# Altium PCB CFD_2Channel.PcbDoc (part 2 of 3)
Units mil, origin at the board's own origin, x right, y up, seen from the top; angles counter-clockwise.
Board outline 5560 x 8750 mil, 4 copper layers (Top Layer, Top Plane, Bottom Plane, Bottom Layer), stack 61.356 mil thick; 216 components, 185 nets, 910 pads, 397 vias.
Unrouted connection lines stored in the file: 1.
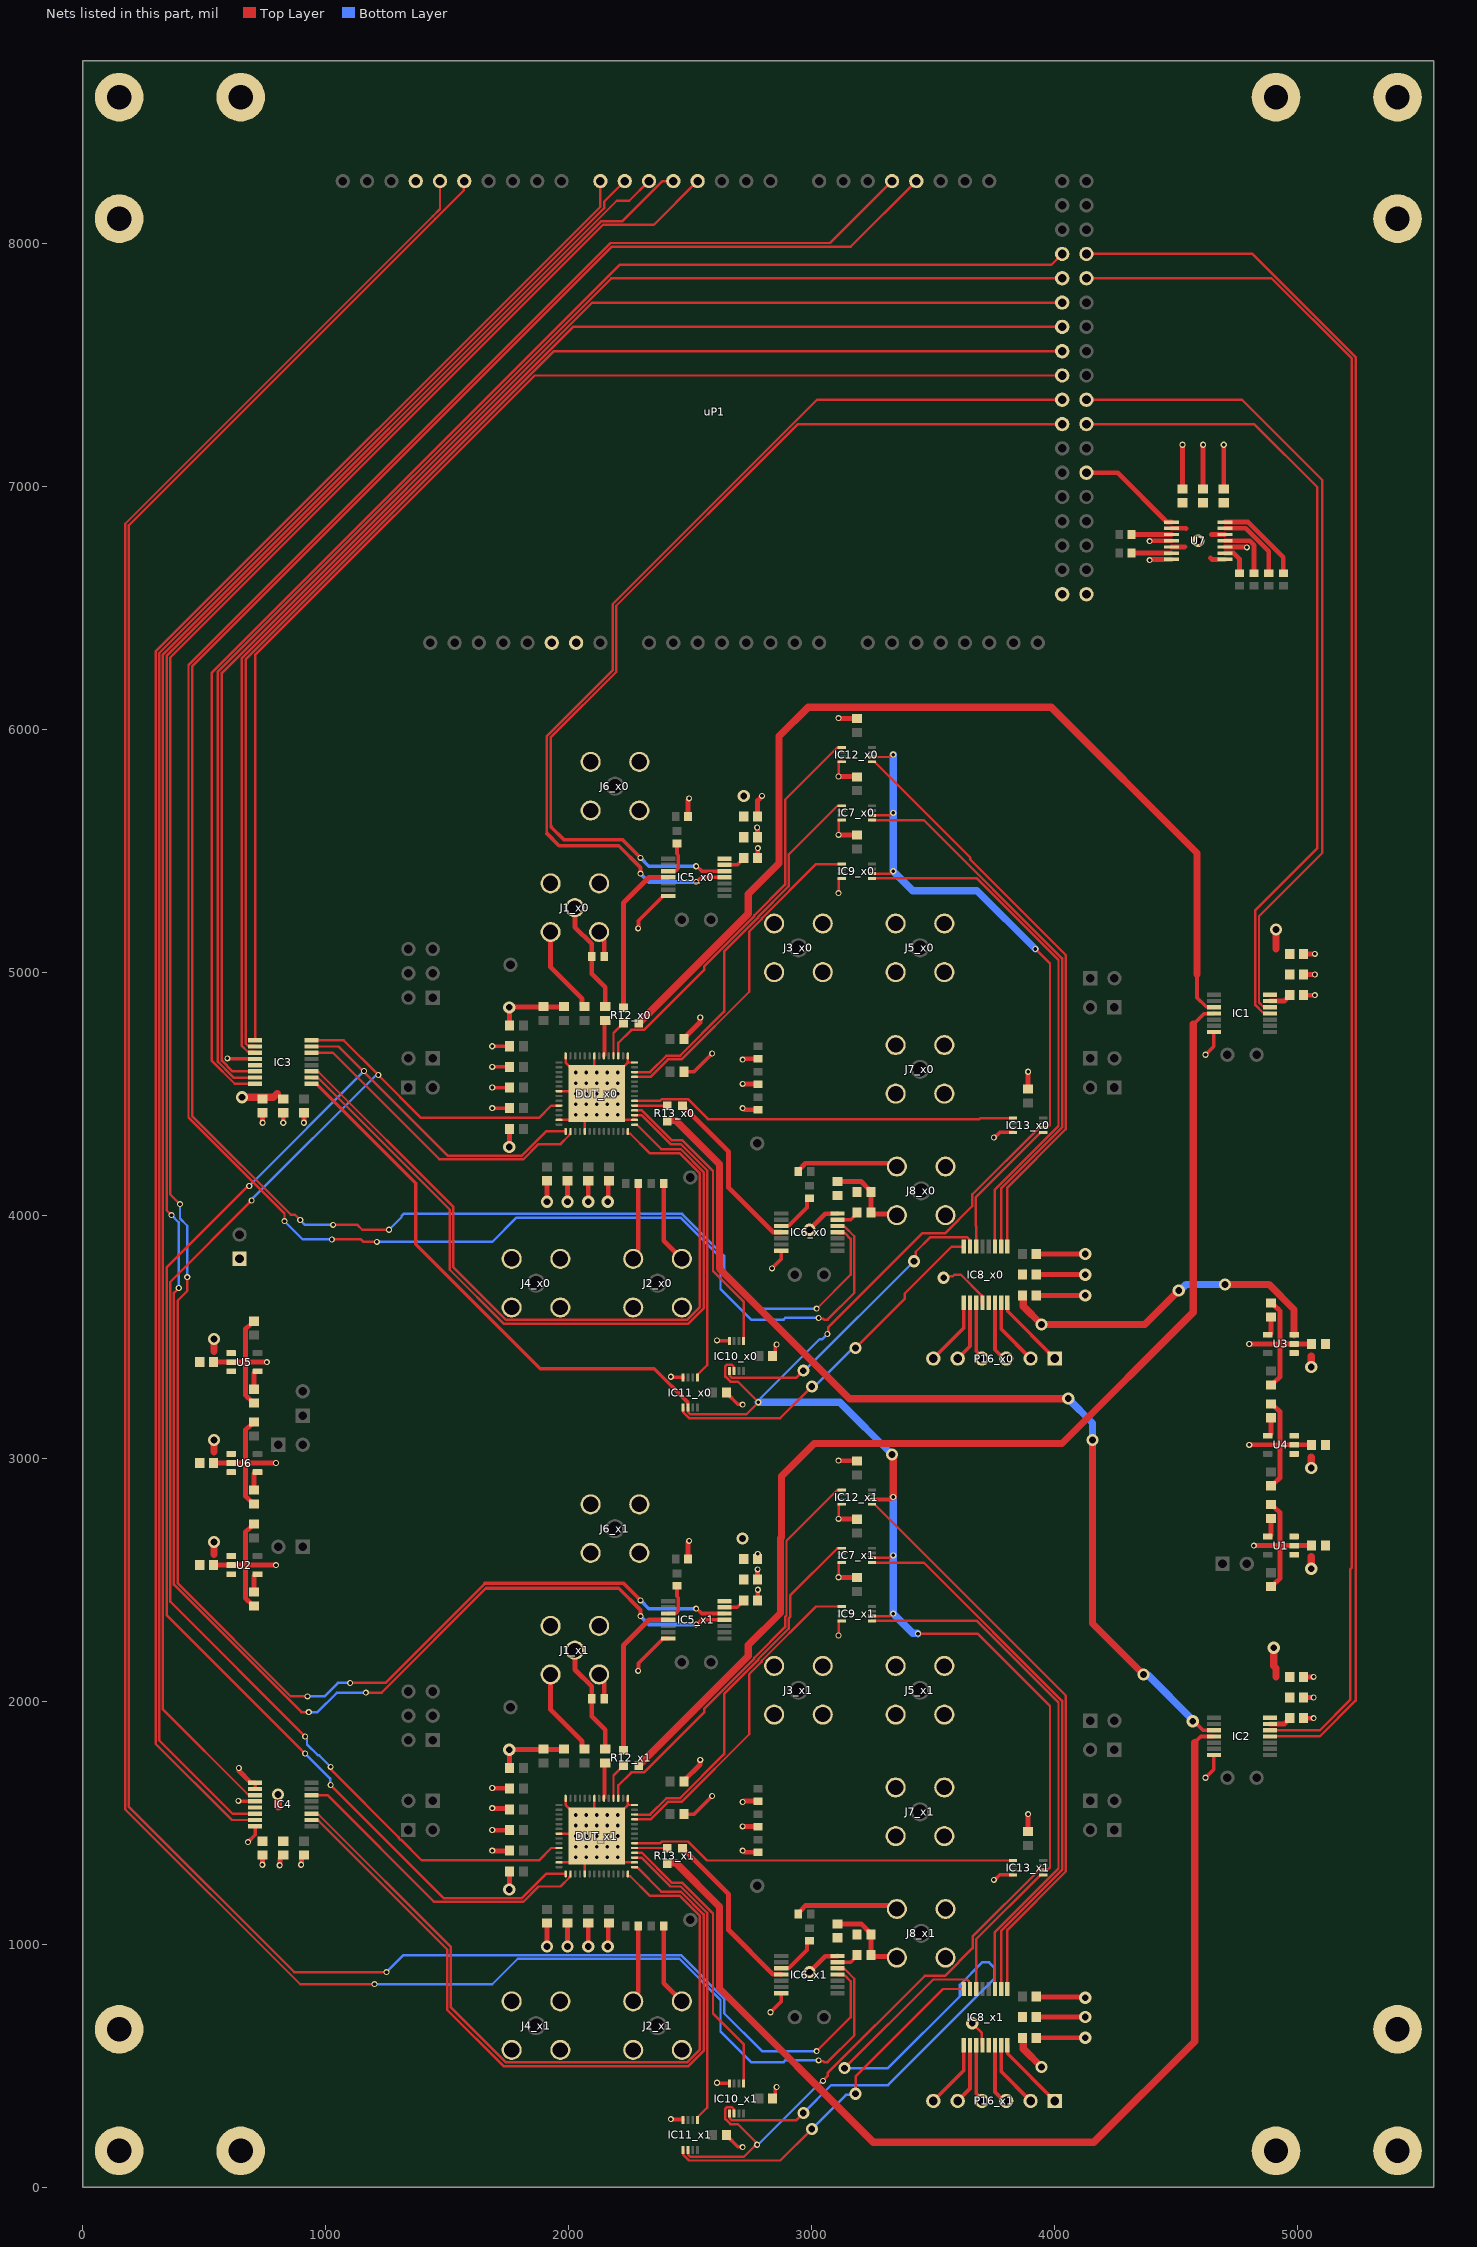
[diagram p4: the nets of this part, all layers, seen from the top]

## Via types
v1: diameter 25, hole 15, Top Layer to Bottom Layer, 290 vias
v2: diameter 50, hole 28, Top Layer to Bottom Layer, 105 vias
v3: diameter 59.06, hole 35.43, Top Layer to Bottom Layer, 2 vias

## Nets (pads, with @x,y where several pads share a name; then routed paths per layer and width w, separated by ;. In a path a pad name is that pad's centre, name@x,y a point inside that pad or via, vN(x,y) a via of type N, cw(c..) or ccw(c..) an arc to the next point about the centre after c; other vN are vias at no path point) (continued)
+3.3VPSU: C1.1 C3.1 C7.1 C9.1 C13.1 C15.1 C20.1 C21.1 C23.1 C24.1 C25.2 C26.2 C28.2 C29.2 C32_x0.1 C32_x1.1 C33_x0.1 C33_x1.1 C35_x0.1 C35_x1.1 C36_x0.1 C36_x1.1 C41_x0.2 C41_x1.2 C42_x0.2 C42_x1.2 C62.1 C63.1 C64.1 IC1.14 IC2.14 IC3.13 IC4.13 IC5_x0.14 IC5_x1.14 IC6_x0.14 IC6_x1.14 IC8_x0.13 IC8_x1.13 P3.1 pad.2 U1.1 U1.3 U2.1 U2.3 U3.1 U3.3 U4.1 U4.3 U5.1 U5.3 U6.1 U6.3 U7.2 U7.5 U7.8 U7.12 | length 2778.3
  Top Layer w20: v2(2990,885) 3055.63,950.63 3104.53,950.63 IC6_x1.14@3105.67,951.77 ; v2(2990,3940) 3055.63,4005.63 3104.53,4005.63 IC6_x0.14@3105.67,4006.77 ; U7.5@4479.76,6749.41 4534.41,6749.41 4535,6750 ; U7.2@4479.76,6826.18 4538.82,6826.18 4540,6825 ; 4640,6705 4646.77,6698.23 U7.8@4700.24,6698.23 ; 4645,6800 4645.59,6800.59 U7.12@4700.24,6800.59
  Top Layer w30: 540,2605 v2(540,2655) ; 540,3025 v2(540,3075) ; 540,3440 v2(540,3490) ; v2(655,4485) 785,4485 800,4500 ; v2(803.29,1616.2) 805,1614.49 805,1565 ; C42_x1.2@3866.46,615 3870.16,611.3 3870.16,569.84 v2(3945,495) ; C42_x0.2@3866.46,3670 3870.16,3666.3 3870.16,3624.84 v2(3945,3550) 4370,3550 v2(4510,3690) ; v2(4700,3715) 4881.2,3715 4984.13,3612.06 U3.3@4984.13,3507.4 ; v2(4900.5,2220) 4900.5,2144.5 4910,2135 4910,2100 ; 4910,5095 v2(4910,5175) ; v2(5055,2545) 5055,2595 ; v2(5055,2960) 5055,3005 ; v2(5055,3375) 5055,3420
  Bottom Layer w30: v2(4510,3690) 4515.41,3690 4540.41,3715 v2(4700,3715)
  other v2: 2715,2670 2720,5725 4590,6775
CLK_16MHz: U7.1 uP1.45 | length 433.9
  Top Layer w20: uP1.45@4130,7055 4258.15,7055 4461.38,6851.77 U7.1@4479.76,6851.77
GND: C1.2 C2.2 C3.2 C4.2 C5.2 C6.2 C7.2 C8.2 C9.2 C10.2 C11.2 C12.2 C13.2 C14.2 C15.2 C16.2 C17.2 C18.2 C19.2 C20.2 C21.2 C22.2 C23.2 C24.2 C25.1 C26.1 C27.2 C28.1 C29.1 C30.2 C32_x0.2 C32_x1.2 C33_x0.2 C33_x1.2 C34_x0.2 C34_x1.2 C35_x0.2 C35_x1.2 C36_x0.2 C36_x1.2 C37_x0.2 C37_x1.2 C38_x0.1 C38_x1.1 C39_x0.1 C39_x1.1 C40_x0.1 C40_x1.1 C41_x0.1 C41_x1.1 C42_x0.1 C42_x1.1 C43_x0.1 C43_x1.1 C44_x0.1 C44_x1.1 C45_x0.1 C45_x1.1 C46_x0.1 C46_x1.1 C47_x0.1 C47_x1.1 C48_x0.1 C48_x1.1 C49_x0.1 C49_x1.1 C50_x0.1 C50_x1.1 C51_x0.1 C51_x1.1 C52_x0.1 C52_x1.1 C53_x0.1 C53_x1.1 C54_x0.1 C54_x1.1 C55_x0.1 C55_x1.1 C56_x0.1 C56_x1.1 C57_x0.1 C57_x1.1 C58_x0.1 C58_x1.1 C59_x0.1 C59_x1.1 C60_x0.1 C60_x1.1 C61_x0.1 C61_x1.1 C62.2 C63.2 C64.2 CORNER1.1 CORNER2.1 CORNER3.1 CORNER4.1 DUT_x0.7 DUT_x0.13 DUT_x0.19 DUT_x0.30 DUT_x0.42 DUT_x0.43 DUT_x0.50 DUT_x0.56 DUT_x1.7 DUT_x1.13 DUT_x1.19 DUT_x1.30 DUT_x1.42 DUT_x1.43 DUT_x1.50 DUT_x1.56 IC1.7 IC2.7 IC3.12 IC4.9 IC4.10 IC4.12 IC4.16 IC5_x0.7 IC5_x1.7 IC6_x0.7 IC6_x1.7 IC7_x0.4 IC7_x1.4 IC8_x0.12 IC8_x1.12 IC9_x0.4 IC9_x1.4 IC10_x0.4 IC10_x1.4 IC11_x0.4 IC11_x1.4 IC12_x0.4 IC12_x1.4 IC13_x0.4 IC13_x1.4 J1_x0.2 J1_x0.3 J1_x0.4 J1_x0.5 J1_x1.2 J1_x1.3 J1_x1.4 J1_x1.5 J2_x0.2 J2_x0.3 J2_x0.4 J2_x0.5 J2_x1.2 J2_x1.3 J2_x1.4 J2_x1.5 J3_x0.2 J3_x0.3 J3_x0.4 J3_x0.5 J3_x1.2 J3_x1.3 J3_x1.4 J3_x1.5 J4_x0.2 J4_x0.3 J4_x0.4 J4_x0.5 J4_x1.2 J4_x1.3 J4_x1.4 J4_x1.5 J5_x0.2 J5_x0.3 J5_x0.4 J5_x0.5 J5_x1.2 J5_x1.3 J5_x1.4 J5_x1.5 J6_x0.2 J6_x0.3 J6_x0.4 J6_x0.5 J6_x1.2 J6_x1.3 J6_x1.4 J6_x1.5 J7_x0.2 J7_x0.3 J7_x0.4 J7_x0.5 J7_x1.2 J7_x1.3 J7_x1.4 J7_x1.5 J8_x0.2 J8_x0.3 J8_x0.4 J8_x0.5 J8_x1.2 J8_x1.3 J8_x1.4 J8_x1.5 R2_x0.1 R2_x1.1 R3_x0.1 R3_x1.1 R4_x0.1 R4_x1.1 R5_x0.1 R5_x1.1 R7_x0.1 R7_x1.1 R8_x0.1 R8_x1.1 R10_x0.1 R10_x1.1 R11_x0.1 R11_x1.1 U1.2 U2.2 U3.2 U4.2 U5.2 U6.2 U7.4 U7.7 U7.10 uP1.GND | length 19215.9
  Top Layer w10: DUT_x1.13@1959.49,1336.73 2006.73,1336.73 v1(2028.39,1358.39) DUT_x1.30@2065.79,1395.79 ; DUT_x1.7@1959.49,1454.84 DUT_x1.30@2105.16,1454.84 ; DUT_x0.13@1959.49,4391.73 2006.73,4391.73 v1(2028.39,4413.39) DUT_x0.30@2065.79,4450.79 ; DUT_x0.7@1959.49,4509.84 DUT_x0.30@2105.16,4509.84 ; DUT_x1.56@1987.05,1600.51 1987.05,1572.95 v1(2028.39,1531.61) v1(2071.69,1488.31) DUT_x1.30@2105.16,1454.84 ; DUT_x0.56@1987.05,4655.51 1987.05,4627.95 v1(2028.39,4586.61) v1(2071.69,4543.31) DUT_x0.30@2105.16,4509.84 ; DUT_x1.19@2065.79,1289.49 DUT_x1.30@2065.79,1395.79 ; DUT_x0.19@2065.79,4344.49 DUT_x0.30@2065.79,4450.79 ; DUT_x1.50@2105.16,1600.51 DUT_x1.30@2105.16,1454.84 ; DUT_x0.50@2105.16,4655.51 DUT_x0.30@2105.16,4509.84 ; DUT_x1.43@2242.95,1600.51 2242.95,1572.95 ; DUT_x0.43@2242.95,4655.51 2242.95,4627.95 ; DUT_x1.30@2270.51,1336.73 2223.27,1336.73 v1(2201.61,1358.39) v1(2158.31,1401.69) v1(2115,1445) ; DUT_x1.42@2270.51,1572.95 2242.95,1572.95 ; DUT_x0.30@2270.51,4391.73 2223.27,4391.73 v1(2201.61,4413.39) v1(2158.31,4456.69) v1(2115,4500) ; DUT_x0.42@2270.51,4627.95 2242.95,4627.95 ; v1(3110,2270) 3111.26,2271.26 3111.26,2329.57 3112.17,2330.47 IC9_x1.4@3122.99,2330.47 ; v1(3110,2510) 3111.26,2511.26 3111.26,2569.57 3112.17,2570.47 IC7_x1.4@3122.99,2570.47 ; v1(3110,2750) 3111.26,2751.26 3111.26,2809.57 3112.17,2810.47 IC12_x1.4@3122.99,2810.47 ; v1(3110,5325) 3111.26,5326.26 3111.26,5384.57 3112.17,5385.47 IC9_x0.4@3122.99,5385.47 ; v1(3110,5565) 3111.26,5566.26 3111.26,5624.57 3112.17,5625.47 IC7_x0.4@3122.99,5625.47 ; v1(3110,5805) 3111.26,5806.26 3111.26,5864.57 3112.17,5865.47 IC12_x0.4@3122.99,5865.47 ; v2(3542.43,3742.57) 3547.95,3748.1 3579.93,3748.1 3586.83,3755 3612.98,3755 3698.35,3669.63 3698.35,3643.19 IC8_x0.12@3702.2,3639.33 ; v2(3660,675) 3698.35,636.65 3698.35,588.19 IC8_x1.12@3702.2,584.33 ; DUT_x1.30@2065.79,1395.79 v1(2071.69,1401.69) v1(2115,1445) ; DUT_x0.30@2065.79,4450.79 v1(2071.69,4456.69) v1(2115,4500) ; DUT_x1.30@2105.16,1454.84 v1(2115,1445) ; DUT_x0.30@2105.16,4509.84 v1(2115,4500) ; v1(2115,1445) v1(2158.31,1488.31) v1(2201.61,1531.61) 2242.95,1572.95 ; v1(2115,4500) v1(2158.31,4543.31) v1(2201.61,4586.61) 2242.95,4627.95
  Top Layer w15: v1(595,4645) 596.1,4643.9 708.23,4643.9 IC3.12@709.33,4642.8 ; v1(640,1590) 641.1,1588.9 708.23,1588.9 IC4.12@709.33,1587.8 IC4.12@710.69,1589.15 ; v1(680,1420) 680,1420.59 709.33,1449.92 IC4.16@709.33,1485.43 ; IC4.9@709.33,1664.57 IC4.10@709.33,1638.98 IC4.10@710.69,1637.62 ; v1@1682.32,4439.35 C52_x0.1@1753.05,4439.35 ; v1@1682.32,4524.35 C46_x0.1@1753.05,4524.35 ; v1@1683.29,4610 C56_x0.1@1755.73,4610 ; v1(1685,4695) C57_x0.1@1756.46,4695 ; v1(2285,2125) 2286.91,2126.91 2286.91,2155.99 2389.15,2258.23 IC5_x1.7@2409.33,2258.23 ; v1(2285,5180) 2286.91,5181.91 2286.91,5210.99 2389.15,5313.23 IC5_x0.7@2409.33,5313.23 ; v1(2420,280) 2421.5,278.5 2468.98,278.5 IC11_x1.4@2470.47,277.01 ; v1(2420,3335) 2421.5,3333.5 2468.98,3333.5 IC11_x0.4@2470.47,3332.01 ; C60_x1.1@2473.54,1535 2515,1535 v1(2590,1610) ; C60_x0.1@2473.54,4590 2515,4590 v1(2590,4665) ; v1(2610,430) 2611.5,428.5 2658.98,428.5 IC10_x1.4@2660.47,427.01 ; v1(2610,3485) 2611.5,3483.5 2658.98,3483.5 IC10_x0.4@2660.47,3482.01 ; C44_x1.1@2648.54,215 2648.54,213.03 2694.66,166.91 2713.09,166.91 v1(2715,165) ; C44_x0.1@2648.54,3270 2648.54,3268.03 2694.66,3221.91 2713.09,3221.91 v1(2715,3220) ; v1(2830,720) 2874.33,764.33 IC6_x1.7@2874.33,798.23 ; v1(2835.91,3780.91) 2874.33,3819.33 IC6_x0.7@2874.33,3853.23 ; C43_x1.1@2838.54,365 2849.74,376.2 2849.74,404.54 2855,409.79 v1(2855,412.5) ; C43_x0.1@2838.54,3420 2849.74,3431.2 2849.74,3459.54 2855,3464.79 v1(2855,3467.5) ; v1(3749.13,1264.6) 3751.84,1264.6 3772.71,1285.47 IC13_x1.4@3827.99,1285.47 ; v1(3749.13,4319.6) 3751.84,4319.6 3772.71,4340.47 IC13_x0.4@3827.99,4340.47 ; v1(4620,1685) 4654.33,1719.33 IC2.7@4654.33,1778.23 ; v1(4620,4660) 4654.33,4694.33 IC1.7@4654.33,4753.23
  Top Layer w20: C3.2@538.54,2560 U2.2@610.87,2560 669.33,2560 ; C15.2@538.54,2980 U6.2@610.87,2980 669.33,2980 ; C13.2@538.54,3395 U5.2@610.87,3395 669.33,3395 ; v1(642.17,1725.09) 643.13,1724.14 643.13,1712.88 691.44,1664.57 IC4.9@709.33,1664.57 ; C6.2@705,2391.46 703.03,2391.46 679.65,2414.84 678.12,2414.84 669.33,2423.63 669.33,2560 ; C4.2@705,2728.54 703.03,2728.54 680.19,2705.7 678.66,2705.7 669.33,2696.37 669.33,2560 ; C18.2@705,2811.46 703.03,2811.46 679.65,2834.84 678.12,2834.84 669.33,2843.63 669.33,2980 ; C16.2@705,3148.54 703.03,3148.54 680.19,3125.7 678.66,3125.7 669.33,3116.37 669.33,2980 ; C17.2@705,3226.46 703.03,3226.46 679.65,3249.84 678.12,3249.84 669.33,3258.63 669.33,3395 ; C14.2@705,3563.54 703.03,3563.54 680.19,3540.7 678.66,3540.7 669.33,3531.37 669.33,3395 ; v1(738.87,1327.02) 739.43,1327.58 739.43,1365.57 739.27,1365.73 C28.1@740,1366.46 ; v1(740,4380) 740,4420 739.27,4420.73 C25.1@740,4421.46 ; v1(757.5,3395) 669.33,3395 ; v1(795,2560) 669.33,2560 ; v1(795,2980) 669.33,2980 ; v1(810,1325) 810.96,1325.96 810.96,1352.41 814.33,1355.79 814.33,1357.76 823.03,1366.46 C29.1@825,1366.46 ; v1(825,4380) C26.1@825,4421.46 ; v1(898.87,1327.02) 899.83,1327.97 899.83,1357.76 908.53,1366.46 C30.2@910,1366.46 ; v1(910,4380) C27.2@910,4421.46 ; v1@1681.89,1468.69 C46_x1.1@1750.84,1468.69 ; v1@1681.89,1558.69 C56_x1.1@1750.84,1558.69 ; v1(1685,1642.5) 1685.96,1641.54 1754.91,1641.54 C57_x1.1@1756.46,1640 ; v1@1686.89,1383.69 C52_x1.1@1755.84,1383.69 ; v2(1755,1225) 1755.73,1225.73 1755.73,1299.27 C47_x1.1@1756.46,1300 ; v2(1755,4280) 1755.73,4280.73 1755.73,4354.27 C47_x0.1@1756.46,4355 ; C52_x1.1@1755.73,1385.73 C52_x1.1@1756.46,1385 ; C52_x0.1@1755.73,4440.73 C52_x0.1@1756.46,4440 ; C58_x1.1@1756.46,1725 1755.73,1725.73 1755.73,1799.27 v2(1755,1800) 1756.77,1801.77 1978.23,1801.77 C49_x1.1@1980,1803.54 ; C58_x0.1@1756.46,4780 1755.73,4780.73 1755.73,4854.27 v2(1755,4855) 1756.77,4856.77 1978.23,4856.77 C49_x0.1@1980,4858.54 ; v2(1910,990) C53_x1.1@1910,1086.46 ; v2(1910,4055) C53_x0.1@1910,4141.46 ; J1_x1.3@1925,2110 1925,1965 2054.83,1835.17 2054.83,1812.24 2063.53,1803.54 C59_x1.1@2065,1803.54 ; J1_x0.3@1925,5165 1925,5020 2054.83,4890.17 2054.83,4867.24 2063.53,4858.54 C59_x0.1@2065,4858.54 ; v2(1995,990) C48_x1.1@1995,1086.46 ; v2(1995,4055) C48_x0.1@1995,4141.46 ; v2(2080,990) C55_x1.1@2080,1086.46 ; v2(2080,4055) C55_x0.1@2080,4141.46 ; J1_x1.4@2125,2110 2125,2093.04 2145.59,2072.45 R2_x1.1@2145.59,2010 ; J1_x0.4@2125,5165 2125,5148.04 2145.59,5127.45 R2_x0.1@2145.59,5065 ; v2(2160,990) 2162.5,992.5 2162.5,1083.96 C61_x1.1@2165,1086.46 ; v2(2160,4055) 2162.5,4057.5 2162.5,4138.96 C61_x0.1@2165,4141.46 ; J2_x1.2@2265,765 2265,781.96 2285.59,802.55 R5_x1.1@2285.59,1075 ; J2_x0.2@2265,3820 2265,3836.96 2285.59,3857.55 R5_x0.1@2285.59,4130 ; R3_x1.1@2390.59,1075 2390.59,839.41 J2_x1.5@2465,765 ; R3_x0.1@2390.59,4130 2390.59,3894.41 J2_x0.5@2465,3820 ; C50_x1.1@2473.54,1670 2473.54,1671.97 2539.78,1738.21 2539.78,1757.47 v1(2540.74,1758.43) ; C50_x0.1@2473.54,4725 2473.54,4726.97 2539.78,4793.21 2539.78,4812.47 v1(2540.74,4813.43) ; R8_x1.1@2490.59,2585 2490.59,2654.24 2495,2658.65 v1(2495,2660) ; R8_x0.1@2490.59,5640 2490.59,5709.24 2495,5713.65 v1(2495,5715) ; v1(2715,1385) 2716.35,1385 2722.75,1378.6 R10_x1.1@2779.2,1378.6 ; v1(2715,1485) 2715.7,1484.3 2778.5,1484.3 R7_x1.1@2779.2,1483.6 ; v1(2715,1585) 2716.35,1585 2719.95,1588.6 R4_x1.1@2779.2,1588.6 ; v1(2715,4440) 2716.35,4440 2722.75,4433.6 R10_x0.1@2779.2,4433.6 ; v1(2715,4540) 2715.7,4539.3 2778.5,4539.3 R7_x0.1@2779.2,4538.6 ; v1(2715,4640) 2716.35,4640 2719.95,4643.6 R4_x0.1@2779.2,4643.6 ; v1@2775.96,5595.96 v1(2775,5595) 2775.96,5594.04 2775.96,5555 C33_x0.2@2778.09,5552.87 ; C32_x0.2@2775.96,5638.87 C32_x0.2@2777.09,5640 2777.09,5705.73 2795,5723.65 v1(2795,5725) ; C34_x1.2@2777.09,2415 2777.5,2415.41 2777.5,2457.98 v1(2777.91,2458.4) v1@2777.5,2458.81 ; v1(2777.09,2542.5) C33_x1.2@2777.09,2500 C33_x1.2@2777.5,2499.59 ; C32_x1.2@2777.09,2585 2777.19,2585.1 2777.19,2606.38 v1(2777.29,2606.48) ; C34_x0.2@2777.09,5470 2777.59,5470.5 2777.59,5509.5 v1(2778.09,5510) ; R11_x1.1@2944.41,1125 2944.41,1127.95 2964.3,1147.84 2964.3,1149.37 2973.63,1158.7 3319.34,1158.7 3333.04,1145 J8_x1.2@3350,1145 ; R11_x0.1@2944.41,4180 2944.41,4182.95 2964.3,4202.84 2964.3,4204.37 2973.63,4213.7 3319.34,4213.7 3333.04,4200 J8_x0.2@3350,4200 ; C35_x1.2@3105,1083.54 3203.5,1083.54 3234.84,1052.2 3234.84,1048.7 C36_x1.2@3243.54,1040 C37_x1.2@3243.54,955 3248.54,950 3345,950 J8_x1.3@3350,945 ; C35_x0.2@3105,4138.54 3203.5,4138.54 3234.84,4107.2 3234.84,4103.7 C36_x0.2@3243.54,4095 C37_x0.2@3243.54,4010 3248.54,4005 3345,4005 J8_x0.3@3350,4000 ; v1(3110,2510) 3110.73,2509.27 3184.27,2509.27 C39_x1.1@3185,2508.54 ; v1(3110,2750) 3110.73,2749.27 3184.27,2749.27 C38_x1.1@3185,2748.54 ; v1(3110,2990) 3110.73,2989.27 3184.27,2989.27 C45_x1.1@3185,2988.54 ; v1(3110,5565) 3110.73,5564.27 3184.27,5564.27 C39_x0.1@3185,5563.54 ; v1(3110,5805) 3110.73,5804.27 3184.27,5804.27 C38_x0.1@3185,5803.54 ; v1(3110,6045) 3110.73,6044.27 3184.27,6044.27 C45_x0.1@3185,6043.54 ; C51_x1.1@3890,1463.54 v1(3890,1535) ; C51_x0.1@3890,4518.54 v1(3890,4590) ; C42_x1.1@3923.54,615 v2(4125,615) ; C41_x1.1@3923.54,700 v2(4125,700) ; C40_x1.1@3923.54,785 3926.04,782.5 4122.5,782.5 v2(4125,780) ; C42_x0.1@3923.54,3670 v2(4125,3670) ; C41_x0.1@3923.54,3755 v2(4125,3755) ; C40_x0.1@3923.54,3840 v2(4125,3840) ; v1(4390,6695) 4391.35,6695 4394.58,6698.23 U7.7@4479.76,6698.23 ; v1(4390,6773.09) 4391.35,6773.09 4393.26,6775 U7.4@4479.76,6775 ; C62.2@4525,6988.54 v1(4525,7170) ; C63.2@4610,6988.54 v1(4610,7170) ; C64.2@4695,6988.54 v1(4695,7170) ; U7.10@4700.24,6749.41 4786.74,6749.41 4788.65,6747.5 v1(4790,6747.5) ; v1(4800,3055) 4925.67,3055 ; v1(4800,3470) 4925.67,3470 ; v1(4818.83,2640) 4925.67,2640 ; C2.2@4890,2471.46 4891.97,2471.46 4915.35,2494.84 4916.88,2494.84 4925.67,2503.63 4925.67,2640 ; C5.2@4890,2808.54 4891.97,2808.54 4914.81,2785.7 4916.34,2785.7 4925.67,2776.37 4925.67,2640 ; C10.2@4890,2886.46 4891.97,2886.46 4915.35,2909.84 4916.88,2909.84 4925.67,2918.63 4925.67,3055 ; C12.2@4890,3223.54 4891.97,3223.54 4914.81,3200.7 4916.34,3200.7 4925.67,3191.37 4925.67,3055 ; C8.2@4890,3301.46 4891.97,3301.46 4915.35,3324.84 4916.88,3324.84 4925.67,3333.63 4925.67,3470 ; C11.2@4890,3638.54 4891.97,3638.54 4914.81,3615.7 4916.34,3615.7 4925.67,3606.37 4925.67,3470 ; C22.2@5023.54,1930 v1(5065,1930) ; C23.2@5023.54,2014.27 C23.2@5024.27,2015 ; C23.2@5023.54,2015.73 C23.2@5024.27,2015 ; C24.2@5023.54,2099.27 C24.2@5024.27,2100 ; C24.2@5023.54,2100 C24.2@5024.27,2100 ; C20.2@5023.54,4990 v1(5070,4990) ; C21.2@5023.54,5075 v1(5070,5075) ; C19.2@5024.27,4905.73 C19.2@5023.54,4905 v1(5070,4905) ; C1.2@5056.46,2640 U1.2@4984.13,2640 4925.67,2640 ; C9.2@5056.46,3055 U4.2@4984.13,3055 4925.67,3055 ; C7.2@5056.46,3470 U3.2@4984.13,3470 4925.67,3470 ; v1(5065,2015) C23.2@5024.27,2015 ; v1(5065,2100) C24.2@5024.27,2100
  other v1: 2071.69,1358.39 2115,1358.39 2158.31,1358.39 1685,1385 2028.39,1401.69 2115,1401.69 2201.61,1401.69 2028.39,1445 2071.69,1445 2158.31,1445 2201.61,1445 1685,1470 2028.39,1488.31 2115,1488.31 2201.61,1488.31 2071.69,1531.61 2115,1531.61 2158.31,1531.61 1685,1560 2071.69,4413.39 2115,4413.39 2158.31,4413.39 1685,4440 2028.39,4456.69 2115,4456.69 2201.61,4456.69 2028.39,4500 2071.69,4500 2158.31,4500 2201.61,4500 1685,4525 2028.39,4543.31 2115,4543.31 2201.61,4543.31 2071.69,4586.61 2115,4586.61 2158.31,4586.61 1685,4610
IIN_COUPLE_x0: C31_x0.2 DUT_x0.48 | length 148.2
  Top Layer w15: DUT_x0.48@2144.53,4655.51 2146.79,4657.78 2146.79,4798.25 C31_x0.2@2150,4801.46
IIN_COUPLE_x1: C31_x1.2 DUT_x1.48 | length 148.2
  Top Layer w15: DUT_x1.48@2144.53,1600.51 2146.79,1602.78 2146.79,1743.25 C31_x1.2@2150,1746.46
IIN_x0: C31_x0.1 J1_x0.1 R2_x0.2 | length 458.2
  Top Layer w20: J1_x0.1@2025,5265 2025,5185.33 2094.41,5115.92 R2_x0.2@2094.41,5065 2094.41,4992.44 2150,4936.85 C31_x0.1@2150,4858.54
IIN_x1: C31_x1.1 J1_x1.1 R2_x1.2 | length 458.2
  Top Layer w20: J1_x1.1@2025,2210 2025,2130.33 2094.41,2060.92 R2_x1.2@2094.41,2010 2094.41,1937.44 2150,1881.85 C31_x1.1@2150,1803.54
NetC5_1: C5.1 U1.4 | length 84.5
  Top Layer w20: U1.4@4875.87,2677.4 4883.74,2677.4 4890,2683.66 C5.1@4890,2751.46
NetC6_1: C6.1 U2.4 | length 84.5
  Top Layer w20: C6.1@705,2448.54 705,2516.34 711.26,2522.6 U2.4@719.13,2522.6
NetC11_1: C11.1 U3.4 | length 84.5
  Top Layer w20: U3.4@4875.87,3507.4 4883.74,3507.4 4890,3513.66 C11.1@4890,3581.46
NetC12_1: C12.1 U4.4 | length 84.5
  Top Layer w20: U4.4@4875.87,3092.4 4883.74,3092.4 4890,3098.66 C12.1@4890,3166.46
NetC17_1: C17.1 U5.4 | length 84.5
  Top Layer w20: C17.1@705,3283.54 705,3351.34 711.26,3357.6 U5.4@719.13,3357.6
NetC18_1: C18.1 U6.4 | length 84.5
  Top Layer w20: C18.1@705,2868.54 705,2936.34 711.26,2942.6 U6.4@719.13,2942.6
NetC19_1: C19.1 IC1.13 | length 91.8
  Top Layer w20: IC1.13@4885.67,4881.18 4944.61,4881.18 4966.46,4903.03 C19.1@4966.46,4905
NetC22_1: C22.1 IC2.13 | length 91.8
  Top Layer w20: IC2.13@4885.67,1906.18 4944.61,1906.18 4966.46,1928.03 C22.1@4966.46,1930
NetC34_x0_1: C34_x0.1 IC5_x0.13 | length 92.4
  Top Layer w15: IC5_x0.13@2640.67,5441.18 2693.15,5441.18 2720,5468.03 C34_x0.1@2720,5470
NetC34_x1_1: C34_x1.1 IC5_x1.13 | length 92.4
  Top Layer w15: IC5_x1.13@2640.67,2386.18 2693.15,2386.18 2720,2413.03 C34_x1.1@2720,2415
NetC37_x0_1: C37_x0.1 IC6_x0.13 | length 93.9
  Top Layer w15: IC6_x0.13@3105.67,3981.18 3159.61,3981.18 3186.46,4008.03 C37_x0.1@3186.46,4010
NetC37_x1_1: C37_x1.1 IC6_x1.13 | length 93.9
  Top Layer w15: IC6_x1.13@3105.67,926.18 3159.61,926.18 3186.46,953.03 C37_x1.1@3186.46,955
NetIC5_x0_3: IC5_x0.3 R6_x0.2 | length 151
  Top Layer w15: IC5_x0.3@2409.33,5415.59 2410.69,5416.95 2440.67,5416.95 2450.87,5427.15 2450.87,5480.81 2445,5486.67 R6_x0.2@2445,5529.41
NetIC5_x1_3: IC5_x1.3 R6_x1.2 | length 151
  Top Layer w15: IC5_x1.3@2409.33,2360.59 2410.69,2361.95 2440.67,2361.95 2450.87,2372.15 2450.87,2425.81 2445,2431.67 R6_x1.2@2445,2474.41
NetIC6_x0_3: IC6_x0.3 R9_x0.2 | length 180.4
  Top Layer w15: IC6_x0.3@2874.33,3955.59 2875.69,3956.95 2905.67,3956.95 2979.88,4031.16 2979.88,4061.16 2988.13,4069.41 R9_x0.2@2990,4069.41
NetIC6_x1_3: IC6_x1.3 R9_x1.2 | length 180.4
  Top Layer w15: IC6_x1.3@2874.33,900.59 2875.69,901.95 2905.67,901.95 2979.88,976.16 2979.88,1006.16 2988.13,1014.41 R9_x1.2@2990,1014.41
NetIC8_x0_9: IC8_x0.9 P16_x0.6 | length 281.3
  Top Layer w15: P16_x0.6@3500,3410 3625.43,3535.43 IC8_x0.9@3625.43,3639.33
NetIC8_x0_10: IC8_x0.10 P16_x0.5 | length 250.5
  Top Layer w15: P16_x0.5@3600,3410 3651.02,3461.02 IC8_x0.10@3651.02,3639.33
NetIC8_x0_11: IC8_x0.11 P16_x0.4 | length 239
  Top Layer w15: IC8_x0.11@3676.61,3639.33 3676.61,3440.81 3700,3417.43 P16_x0.4@3700,3410
NetIC8_x0_14: IC8_x0.14 P16_x0.3 | length 254.5
  Top Layer w15: IC8_x0.14@3753.39,3639.33 3753.39,3446.61 3790,3410 P16_x0.3@3800,3410
NetIC8_x0_15: IC8_x0.15 P16_x0.2 | length 279.5
  Top Layer w15: IC8_x0.15@3778.98,3639.33 3778.98,3531.02 P16_x0.2@3900,3410
NetIC8_x0_16: IC8_x0.16 P16_x0.1 | length 310.3
  Top Layer w15: IC8_x0.16@3804.57,3639.33 3805.93,3637.97 3805.93,3604.07 P16_x0.1@4000,3410
NetIC8_x1_9: IC8_x1.9 P16_x1.6 | length 281.3
  Top Layer w15: P16_x1.6@3500,355 3625.43,480.43 IC8_x1.9@3625.43,584.33
NetIC8_x1_10: IC8_x1.10 P16_x1.5 | length 250.5
  Top Layer w15: P16_x1.5@3600,355 3651.02,406.02 IC8_x1.10@3651.02,584.33
NetIC8_x1_11: IC8_x1.11 P16_x1.4 | length 239
  Top Layer w15: IC8_x1.11@3676.61,584.33 3676.61,385.81 3700,362.43 P16_x1.4@3700,355
NetIC8_x1_14: IC8_x1.14 P16_x1.3 | length 254.5
  Top Layer w15: IC8_x1.14@3753.39,584.33 3753.39,391.61 3790,355 P16_x1.3@3800,355
NetIC8_x1_15: IC8_x1.15 P16_x1.2 | length 279.5
  Top Layer w15: IC8_x1.15@3778.98,584.33 3778.98,476.02 P16_x1.2@3900,355
NetIC8_x1_16: IC8_x1.16 P16_x1.1 | length 310.3
  Top Layer w15: IC8_x1.16@3804.57,584.33 3805.93,582.97 3805.93,549.07 P16_x1.1@4000,355
NetR1_2: R1.2 U7.3 | length 164.4
  Top Layer w20: R1.2@4315.59,6800 4316.18,6800.59 U7.3@4479.76,6800.59
NetR14_2: R14.2 U7.14 | length 366.2
  Top Layer w20: U7.14@4700.24,6851.77 4795.33,6851.77 4940,6707.1 R14.2@4940,6640.59
NetR15_2: R15.2 U7.11 | length 243.3
  Top Layer w20: U7.11@4700.24,6775 4801.39,6775 4820,6756.39 R15.2@4820,6640.59
NetR16_2: R16.2 U7.13 | length 310
  Top Layer w20: U7.13@4700.24,6826.18 4785.56,6826.18 4880,6731.75 R16.2@4880,6640.59
NetR17_2: R17.2 U7.6 | length 163.8
  Top Layer w20: R17.2@4315.59,6725 4316.18,6724.41 U7.6@4479.17,6724.41
NetR18_2: R18.2 U7.9 | length 128.7
  Top Layer w20: U7.9@4700.24,6723.82 4735.59,6723.82 4760,6699.41 R18.2@4760,6640.59
OUT_CFD_MAIN_LATCH_18_x0: IC8_x0.3 IC9_x0.5 | length 2194.6
  Top Layer w10: IC9_x0.5@3247.01,5385.47 3679.53,5385.47 4015,5050 4015,4366.68 3753.39,4105.07 IC8_x0.3@3753.39,3870.67
OUT_CFD_MAIN_LATCH_18_x1: IC8_x1.3 IC9_x1.5 | length 2194.6
  Top Layer w10: IC9_x1.5@3247.01,2330.47 3679.53,2330.47 4015,1995 4015,1311.68 3753.39,1050.07 IC8_x1.3@3753.39,815.67
OUT_CFD_MAIN_LV_x0: DUT_x0.39 IC9_x0.1 | length 1362.1
  Top Layer w10: DUT_x0.39@2270.51,4568.9 2336.22,4568.9 2407.99,4640.67 2463.94,4640.67 2742.48,4919.21 2742.48,5166.7 2793.66,5217.89 2793.66,5221.27 3016.92,5444.53 IC9_x0.1@3122.99,5444.53
OUT_CFD_MAIN_LV_x1: DUT_x1.39 IC9_x1.1 | length 1362.1
  Top Layer w10: DUT_x1.39@2270.51,1513.9 2336.22,1513.9 2407.99,1585.67 2463.94,1585.67 2742.48,1864.21 2742.48,2111.7 2793.66,2162.89 2793.66,2166.27 3016.92,2389.53 IC9_x1.1@3122.99,2389.53
OUT_CFD_SMALL_LATCH_18_x0: IC8_x0.8 IC11_x0.5 | length 1488.5
  Top Layer w10: IC11_x0.5@2470.47,3207.99 2471.38,3207.09 2471.38,3188.27 2494.64,3165 2870,3165 v2(3000,3295) ; v2(3180.01,3453.8) 3381.67,3655.45 3381.67,3676.67 3575.67,3870.67 IC8_x0.8@3625.43,3870.67
  Bottom Layer w10: v2(3000,3295) 3010.61,3295 3169.41,3453.8 v2(3180.01,3453.8)
OUT_CFD_SMALL_LATCH_18_x1: IC8_x1.8 IC11_x1.5 | length 1517.6
  Top Layer w10: IC11_x1.5@2470.47,152.99 2471.38,152.09 2471.38,133.27 2494.64,110 2870,110 v2(3000,240) ; v2(3180,385) 3180,455.86 3539.81,815.67 IC8_x1.8@3625.43,815.67
  Bottom Layer w10: v2(3000,240) 3140,380 3175,380 v2(3180,385)
OUT_CFD_SMALL_LV_x0: DUT_x0.31 IC11_x0.1 | length 1261.7
  Top Layer w10: DUT_x0.31@2270.51,4411.42 2270.59,4411.34 2299.56,4411.34 2418.45,4292.45 2460.88,4292.45 2569.53,4183.8 2569.53,3382.83 2530.43,3343.74 2530.43,3332.91 IC11_x0.1@2529.53,3332.01
OUT_CFD_SMALL_LV_x1: DUT_x1.31 IC11_x1.1 | length 1261.7
  Top Layer w10: DUT_x1.31@2270.51,1356.42 2270.59,1356.34 2299.56,1356.34 2418.45,1237.45 2460.88,1237.45 2569.53,1128.8 2569.53,327.83 2530.43,288.74 2530.43,277.91 IC11_x1.1@2529.53,277.01
OUT_LED_MAIN_LATCH_18_x0: IC7_x0.5 IC8_x0.2 | length 2308.3
  Top Layer w10: IC7_x0.5@3247.01,5625.47 3460.74,5625.47 4030,5056.21 4030,4360.47 3778.98,4109.45 IC8_x0.2@3778.98,3870.67
OUT_LED_MAIN_LATCH_18_x1: IC7_x1.5 IC8_x1.2 | length 2308.3
  Top Layer w10: IC7_x1.5@3247.01,2570.47 3460.74,2570.47 4030,2001.21 4030,1305.47 3778.98,1054.45 IC8_x1.2@3778.98,815.67
OUT_LED_MAIN_LV_x0: DUT_x0.40 IC7_x0.1 | length 1529.7
  Top Layer w10: DUT_x0.40@2270.51,4588.58 2334.69,4588.58 2401.78,4655.67 2457.72,4655.67 2639.26,4837.2 2639.26,5084.7 2778.66,5224.1 2778.66,5227.48 2905,5353.82 2905,5484.14 3104.48,5683.62 3122.09,5683.62 IC7_x0.1@3122.99,5684.53
OUT_LED_MAIN_LV_x1: DUT_x1.40 IC7_x1.1 | length 1529.7
  Top Layer w10: DUT_x1.40@2270.51,1533.58 2334.69,1533.58 2401.78,1600.67 2457.72,1600.67 2639.26,1782.2 2639.26,2029.7 2778.66,2169.1 2778.66,2172.48 2905,2298.82 2905,2340.91 2910.79,2346.7 2910.79,2434.93 3104.48,2628.62 3122.09,2628.62 IC7_x1.1@3122.99,2629.53
OUT_LED_SMALL_LATCH_18_x0: IC8_x0.7 IC10_x0.5 | length 1302.6
  Top Layer w10: IC10_x0.5@2660.47,3357.99 2661.38,3357.09 2661.38,3339.99 2671.37,3330 2935,3330 v2(2965,3360) ; v2(3420,3810) 3427.65,3817.65 3427.65,3849.54 3487.82,3909.7 3638.43,3909.7 3647.17,3900.97 3647.17,3874.53 IC8_x0.7@3651.02,3870.67
  Bottom Layer w10: v2(2965,3360) 2970,3360 v2(3420,3810)
OUT_LED_SMALL_LATCH_18_x1: IC8_x1.7 IC10_x1.5 | length 2930.5
  Top Layer w10: IC10_x1.5@2660.47,302.99 2661.38,302.09 2661.38,284.99 2671.37,275 2935,275 v2(2965,305) ; v2(3135,490) 3499.7,854.7 3638.43,854.7 3647.17,845.97 3647.17,819.53 IC8_x1.7@3651.02,815.67
  Bottom Layer w10: v2(2965,305) 3080,420 3313.85,420 3750,856.15 3750,904.5 3729.5,925 3700.5,925 3608.41,832.91 3608.41,785.27 3313.14,490 v2(3135,490)
OUT_LED_SMALL_LV_x0: DUT_x0.32 IC10_x0.1 | length 1168
  Top Layer w10: DUT_x0.32@2280.28,4431.1 2301.01,4431.1 2424.66,4307.45 2467.09,4307.45 2593.31,4181.23 2593.31,3770.65 2719.53,3644.43 IC10_x0.1@2719.53,3482.01
OUT_LED_SMALL_LV_x1: DUT_x1.32 IC10_x1.1 | length 1168
  Top Layer w10: DUT_x1.32@2280.28,1376.1 2301.01,1376.1 2424.66,1252.45 2467.09,1252.45 2593.31,1126.23 2593.31,715.65 2719.53,589.43 IC10_x1.1@2719.53,427.01
OUT_MAIN_HV_DUAL0: IC1.3 R12_x0.2 | length 4117.9
  Top Layer w15: 4585,4990 4585,4894.94 4622.99,4856.95 4652.97,4856.95 IC1.3@4654.33,4855.59
  Top Layer w30: R12_x0.2@2287.99,4790 2738.66,5240.67 2738.66,5321.49 2865,5447.83 2865,5970 2985,6090 3985,6090 4585,5490 4585,4990
OUT_MAIN_HV_DUAL1: IC1.4 R12_x1.2 | length 4695.4
  Top Layer w15: 4570,4785 4613.64,4828.64 4652.97,4828.64 IC1.4@4654.33,4830
  Top Layer w30: R12_x1.2@2287.99,1735 2738.66,2185.67 2738.66,2231.14 2870.79,2363.26 2870.79,2670.28 2875,2674.5 2875,2925 3010,3060 4029.5,3060 4570,3600.5 4570,4785
OUT_MAIN_HV_SINGLE_x0: IC5_x0.4 R12_x0.3 | length 659.8
  Top Layer w20: R12_x0.3@2225,4852.99 2225,5285 2330,5390 IC5_x0.4@2409.33,5390
OUT_MAIN_HV_SINGLE_x1: IC5_x1.4 R12_x1.3 | length 659.8
  Top Layer w20: R12_x1.3@2225,1797.99 2225,2230 2330,2335 IC5_x1.4@2409.33,2335
OUT_MAIN_HV_x0: DUT_x0.46 R12_x0.1 | length 151.5
  Top Layer w10: DUT_x0.46@2183.9,4655.51 2183.9,4748.9 R12_x0.1@2225,4790
OUT_MAIN_HV_x1: DUT_x1.46 R12_x1.1 | length 151.5
  Top Layer w10: DUT_x1.46@2183.9,1600.51 2183.9,1693.9 R12_x1.1@2225,1735
OUT_MAIN_LATCH_18_x0: IC8_x0.1 IC12_x0.5 | length 2431.3
  Top Layer w10: IC12_x0.5@3247.01,5865.47 3247.91,5864.57 3258.74,5864.57 3651.87,5471.44 3651.87,5463.63 4045,5070.5 4045,4354.26 3804.57,4113.83 IC8_x0.1@3804.57,3870.67
OUT_MAIN_LATCH_18_x1: IC8_x1.1 IC12_x1.5 | length 2431.3
  Top Layer w10: IC12_x1.5@3247.01,2810.47 3257.83,2810.47 4045,2023.31 4045,1299.26 3804.57,1058.83 IC8_x1.1@3804.57,815.67
OUT_MAIN_LV_x0: DUT_x0.45 IC12_x0.1 | length 1691
  Top Layer w10: DUT_x0.45@2203.58,4655.51 2203.66,4655.59 2203.66,4708.66 2257.28,4762.28 2309.85,4762.28 2557.82,5010.25 2557.82,5024.47 2763.66,5230.31 2763.66,5233.69 2890,5360.03 2890,5709.14 3104.48,5923.62 3122.09,5923.62 IC12_x0.1@3122.99,5924.53
OUT_MAIN_LV_x1: DUT_x1.45 IC12_x1.1 | length 1691
  Top Layer w10: DUT_x1.45@2203.58,1600.51 2203.66,1600.59 2203.66,1653.66 2257.28,1707.28 2309.85,1707.28 2557.82,1955.25 2557.82,1969.47 2763.66,2175.31 2763.66,2178.69 2890,2305.03 2890,2347.12 2895.79,2352.91 2895.79,2659.93 3104.48,2868.62 3122.09,2868.62 IC12_x1.1@3122.99,2869.53
OUT_SMALL_HV_DUAL0: IC2.3 R13_x0.2 | length 4027.4
  Top Layer w15: v2(4567.65,1917.65) 4572.35,1917.65 4609.41,1880.59 IC2.3@4654.33,1880.59
  Top Layer w30: R13_x0.2@2405,4387.01 2407.72,4389.72 2439.72,4389.72 2620,4209.45 2620,3780 3155,3245 v2(4055,3245) ; v2(4155,3075) 4155,2320 v2(4365,2110)
  Bottom Layer w30: v2(4055,3245) 4155,3145 v2(4155,3075) ; v2(4365,2110) 4368.83,2106.17 4383.83,2106.17 4567.65,1922.35 v2(4567.65,1917.65)
OUT_SMALL_HV_DUAL1: IC2.4 R13_x1.2 | length 4335.9
  Top Layer w15: 4575,1830 4600,1855 IC2.4@4654.33,1855
  Top Layer w30: R13_x1.2@2405,1332.01 2407.72,1334.72 2439.72,1334.72 2620,1154.45 2620,818.16 3253.16,185 4160,185 4575,600 4575,1830
OUT_SMALL_HV_SINGLE_x0: IC6_x0.4 R13_x0.3 | length 707.9
  Top Layer w20: R13_x0.3@2467.99,4450 2657.4,4260.6 2657.4,4113.42 2839.67,3931.14 2873.19,3931.14 IC6_x0.4@2874.33,3930
OUT_SMALL_HV_SINGLE_x1: IC6_x1.4 R13_x1.3 | length 707.9
  Top Layer w20: R13_x1.3@2467.99,1395 2657.4,1205.6 2657.4,1058.42 2839.67,876.14 2873.19,876.14 IC6_x1.4@2874.33,875
OUT_SMALL_HV_x0: DUT_x0.33 R13_x0.1 | length 134.8
  Top Layer w10: DUT_x0.33@2270.51,4450.79 2404.21,4450.79 R13_x0.1@2405,4450
OUT_SMALL_HV_x1: DUT_x1.33 R13_x1.1 | length 134.8
  Top Layer w10: DUT_x1.33@2270.51,1395.79 2404.21,1395.79 R13_x1.1@2405,1395
OUT_SMALL_LATCH_18_x0: IC8_x0.6 IC13_x0.5 | length 591.6
  Top Layer w10: IC8_x0.6@3676.61,3870.67 3676.61,3953.97 3675,3955.58 3675,4074.29 3941.18,4340.47 IC13_x0.5@3952.01,4340.47
OUT_SMALL_LATCH_18_x1: IC8_x1.6 IC13_x1.5 | length 590.2
  Top Layer w10: IC8_x1.6@3676.61,815.67 3676.61,1020.91 3941.18,1285.47 IC13_x1.5@3952.01,1285.47
OUT_SMALL_LV_x0: DUT_x0.34 IC13_x0.1 | length 1596.6
  Top Layer w10: DUT_x0.34@2270.51,4470.47 2375.9,4470.47 2383.14,4477.72 2489.85,4477.72 2572.57,4395 3689.5,4395 3694.03,4399.53 IC13_x0.1@3827.99,4399.53
OUT_SMALL_LV_x1: DUT_x1.34 IC13_x1.1 | length 1592.9
  Top Layer w10: DUT_x1.34@2270.51,1415.47 2375.9,1415.47 2383.14,1422.72 2489.85,1422.72 2568.04,1344.53 IC13_x1.1@3827.99,1344.53
RST_PK_TEST_18: DUT_x0.10 DUT_x1.10 IC3.8 | length 5803.4
  Top Layer w10: v1(695,4060) 360,3725 360,2410 v1(915,1855) ; IC3.8@920.49,4719.57 1073.33,4719.57 v1(1216.24,4576.66) 1216.24,4575.57 1391.8,4400 1876.82,4400 1927.61,4450.79 DUT_x0.10@1959.49,4450.79 ; v1(1020,1730) 1022.87,1727.13 1022.87,1717.13 1300.47,1439.53 1300.47,1436.33 1306.33,1430.47 1309.53,1430.47 1395,1345 1876.82,1345 1927.61,1395.79 DUT_x1.10@1959.49,1395.79
  Bottom Layer w10: v1(695,4060) 695,4063.99 1204.79,4573.79 1213.37,4573.79 v1(1216.24,4576.66) ; v1(915,1855) 922.65,1847.35 922.65,1822.35 967.39,1777.61 972.39,1777.61 v1(1020,1730)
RST_PK_TEST_33: IC3.9 uP1.36 | length 5382.1
  Top Layer w10: IC3.9@709.33,4719.57 709.33,6304.33 1860,7455 uP1.36@4030,7455
RSTb_RETIME_18: IC3.1 IC7_x0.6 IC7_x1.6 IC9_x0.6 IC9_x1.6 IC10_x0.6 IC10_x1.6 IC11_x0.6 IC11_x1.6 IC12_x0.6 IC12_x1.6 IC13_x0.6 IC13_x1.6 | length 12153.7
  Top Layer w10: IC11_x1.6@2490.16,152.99 2491.06,152.09 2491.06,134.79 2500.86,125 2720,125 2763.05,168.05 2764,168.05 2772.13,176.19 2772.13,182.87 2695,260 2665.16,260 2644.57,280.59 2644.57,323.87 2650.42,329.72 2670.52,329.72 2679.25,320.99 2679.25,303.9 IC10_x1.6@2680.16,302.99 ; IC11_x0.6@2490.16,3207.99 2491.06,3207.09 2491.06,3189.79 2500.86,3180 2730,3180 v1(2780,3230) 2695,3315 2665.16,3315 2644.57,3335.59 2644.57,3378.87 2650.42,3384.72 2670.52,3384.72 2679.25,3375.99 2679.25,3358.9 IC10_x0.6@2680.16,3357.99 ; v1(3046.12,438.01) 3046.12,439.13 3065,458.02 3065,470 3464.7,869.7 3547.31,869.7 3661.61,984.01 3661.61,1031.86 3934.01,1304.25 3951.1,1304.25 IC13_x1.6@3952.01,1305.16 3952.91,1306.06 3970.21,1306.06 3980,1315.86 3980,1980 3681.95,2278.05 v1(3436.87,2278.05) ; v1(3063.79,3510.69) 3066.66,3513.56 3066.66,3538.04 3453.32,3924.7 3547.31,3924.7 3660,4037.4 3660,4085.24 3934.01,4359.25 3951.1,4359.25 IC13_x0.6@3952.01,4360.16 3952.91,4361.06 3970.21,4361.06 3980,4370.86 3980,5035 v1(3920,5095) ; IC9_x1.6@3247.01,2350.16 3321.1,2350.16 3330.94,2360 v1(3335,2360) ; IC7_x1.6@3247.01,2590.16 3321.1,2590.16 3330.94,2600 v1(3335,2600) ; IC9_x0.6@3247.01,5405.16 3321.1,5405.16 3330.94,5415 v1(3335,5415) ; IC7_x0.6@3247.01,5645.16 3321.1,5645.16 3330.94,5655 v1(3335,5655) ; IC12_x0.6@3247.01,5885.16 3321.1,5885.16 3330.94,5895 v1(3335,5895)
  Top Layer w15: IC3.1@940.67,4540.43 960.85,4540.43 1370,4131.28 1370,3880 1882.55,3367.45 2351.33,3367.45 2490,3228.78 2490,3225 ; IC12_x1.6@3247.01,2830.16 3322.45,2830.16 3332.29,2840 v1(3335,2840)
  Top Layer w30: v2(3330,3015) 3333.83,3011.17 3333.83,2997.03 3335,2995.86 v1(3335,2840)
  Bottom Layer w10: v1(2775,175) 2779.05,175 3042.06,438.01 v1(3046.12,438.01) ; v1(2780,3230) 2780,3234.06 2789.07,3243.13 2789.07,3246.57 3032.64,3490.14 3043.25,3490.14 v1(3063.79,3510.69)
  Bottom Layer w30: v1(2780,3230) 3115,3230 v2(3330,3015) ; v1(3335,2840) v1(3335,2600) v1(3335,2360) 3415,2280 3434.91,2280 v1(3436.87,2278.05) ; v1(3335,5895) v1(3335,5655) v1(3335,5415) 3415,5335 3680,5335 v1(3920,5095)
RSTb_RETIME_33: IC3.16 uP1.26 | length 6028.2
  Top Layer w10: IC3.16@709.33,4540.43 625.32,4540.43 530,4635.75 530,6231.07 2208.93,7910 3985,7910 uP1.26@4030,7955
SCAN_CLK_180: DUT_x0.28 IC3.3 | length 3113.7
  Top Layer w10: IC3.3@940.67,4591.61 944.53,4587.76 970.97,4587.76 1525,4033.73 1525,3785 1741.34,3568.66 2486.27,3568.66 2539.53,3621.92 2539.53,4171.37 2455.9,4255 2332.44,4255 2252.72,4334.72 2243.03,4334.72 2242.95,4334.8 DUT_x0.28@2242.95,4344.49
SCAN_CLK_181: DUT_x1.28 IC4.3 | length 3113.7
  Top Layer w10: IC4.3@940.67,1536.61 944.53,1532.76 970.97,1532.76 1515,988.73 1515,740 1741.34,513.66 2486.27,513.66 2539.53,566.92 2539.53,1116.37 2455.9,1200 2332.44,1200 2252.72,1279.72 2243.03,1279.72 2242.95,1279.8 DUT_x1.28@2242.95,1289.49
SCAN_CLK_330: IC3.14 uP1.30 | length 5839.2
  Top Layer w10: IC3.14@709.33,4591.61 616.57,4591.61 572.5,4635.68 572.5,6231.14 2096.36,7755 uP1.30@4030,7755
SCAN_CLK_331: IC4.14 uP1.6 | length 7729.3
  Top Layer w10: IC4.14@709.33,1536.61 616.57,1536.61 315,1838.18 315,5646.57 315,6313.05 2145,8143.05 2145,8170 uP1.6@2230,8255
SCAN_INb_18: DUT_x0.15 DUT_x1.15 IC3.7 | length 6031.6
  Top Layer w10: v1(685,4120) 680.94,4120 674,4113.05 673.05,4113.05 345,3785 345,2355 v1(915,1785) ; IC3.7@940.67,4693.98 1052.59,4693.98 1501.56,4245 1806.82,4245 1906.31,4344.49 DUT_x0.15@1987.05,4344.49 ; v1(1020,1655) 1485,1190 1806.82,1190 1906.31,1289.49 DUT_x1.15@1987.05,1289.49
  Bottom Layer w10: v1(685,4120) 685,4120.27 1157.52,4592.79 v1(1157.52,4593.06) ; v1(915,1785) 1017.5,1682.5 1017.5,1657.5 v1(1020,1655)
SCAN_INb_33: IC3.10 uP1.34 | length 5509.6
  Top Layer w10: IC3.10@709.33,4693.98 705.47,4697.83 679.03,4697.83 670,4706.86 670,6286.21 1938.79,7555 uP1.34@4030,7555
SCAN_LOADb_180: DUT_x0.16 IC3.6 | length 1301.7
  Top Layer w10: IC3.6@940.67,4668.39 1029.16,4668.39 1467.54,4230 1813.03,4230 1875.53,4292.5 1966,4292.5 2001.97,4328.47 2001.97,4330.04 2006.73,4334.8 DUT_x0.16@2006.73,4344.49
SCAN_LOADb_181: DUT_x1.16 IC4.6 | length 1301.7
  Top Layer w10: IC4.6@940.67,1613.39 1006.61,1613.39 1445,1175 1813.03,1175 1875.53,1237.5 1966,1237.5 2001.97,1273.47 2001.97,1275.04 2006.73,1279.8 DUT_x1.16@2006.73,1289.49
SCAN_LOADb_330: IC3.11 uP1.32 | length 5601.4
  Top Layer w10: IC3.11@709.33,4668.39 705.47,4672.24 679.03,4672.24 655,4696.27 655,6292.43 2017.57,7655 uP1.32@4030,7655
SCAN_LOADb_331: IC4.11 uP1.5 | length 7673
  Top Layer w10: IC4.11@709.33,1613.39 705.47,1617.24 679.03,1617.24 330,1966.27 330,5652.78 330,6306.84 2197.07,8173.91 2248.91,8173.91 uP1.5@2330,8255
SCAN_OUTb_180: DUT_x0.29 IC3.2 | length 3130.7
  Top Layer w10: IC3.2@940.67,4566.02 944.53,4562.17 970.97,4562.17 1510,4023.14 1510,3775 1731.34,3553.66 2492.48,3553.66 2554.53,3615.71 2554.53,4177.59 2460.44,4271.67 2380.57,4271.67 2280.2,4372.05 DUT_x0.29@2270.51,4372.05
SCAN_OUTb_181: DUT_x1.29 IC4.2 | length 3130.7
  Top Layer w10: IC4.2@940.67,1511.02 944.53,1507.17 970.97,1507.17 1500,978.14 1500,730 1731.34,498.66 2492.48,498.66 2554.53,560.71 2554.53,1122.59 2460.44,1216.67 2380.57,1216.67 2280.2,1317.05 DUT_x1.29@2270.51,1317.05
SCAN_OUTb_330: IC3.15 uP1.28 | length 5930.6
  Top Layer w10: IC3.15@709.33,4566.02 620.94,4566.02 610.35,4576.61 557.5,4629.47 555,4631.97 555,6234.85 2175.15,7855 uP1.28@4030,7855
SCAN_OUTb_331: IC4.15 uP1.7 | length 7727.4
  Top Layer w10: IC4.15@709.33,1511.02 613.98,1511.02 300,1825 300,6285 300,6319.26 2130,8149.26 uP1.7@2130,8255
SPI_CLK_MAIN_DUAL_33: IC1.12 uP1.39 | length 3418.2
  Top Layer w10: uP1.39@4130,7355 4770,7355 5100,7025 5100,5490 4840,5230 4840,4874.81 4855.37,4859.45 4881.81,4859.45 IC1.12@4885.67,4855.59
SPI_CLK_MAIN_SINGLE_330: IC5_x0.12 uP1.40 | length 3956.5
  Top Layer w10: 1927.5,5599.12 1925,5601.62 1925,5964.84 2195,6234.84 2195,6507.43 2942.57,7255 uP1.40@4030,7255
  Top Layer w15: 1927.5,5599.12 1927.5,5596.62 1980,5544.12 2220.88,5544.12 v1(2295,5470) ; v1(2523.83,5435.57) 2526.53,5435.57 2546.51,5415.59 IC5_x0.12@2640.67,5415.59
  Bottom Layer w15: v1(2295,5470) 2329.43,5435.57 v1(2523.83,5435.57)
SPI_CLK_MAIN_SINGLE_331: IC5_x1.12 uP1.3 | length 9523.9
  Top Layer w10: v1(400,4045) 360,4085 360,5665.21 360,6294.41 2140.59,8075 2350,8075 uP1.3@2530,8255 ; v1(430,3745) 430,3687.97 390,3647.97 390,2486.01 856.01,2020 v1(925,2020) ; v1(1100,2075) 1245,2075 1655,2485
  Top Layer w15: 1655,2485 2225,2485 v1(2295,2415) ; v1(2523.83,2380.57) 2526.53,2380.57 2546.51,2360.59 IC5_x1.12@2640.67,2360.59
  Bottom Layer w10: v1(400,4045) 400,3986.21 430,3956.21 v1(430,3745) ; v1(925,2020) 995,2020 1050,2075 v1(1100,2075)
  Bottom Layer w15: v1(2295,2415) 2329.43,2380.57 v1(2523.83,2380.57)
SPI_CLK_SMALL_DUAL_33: IC2.12 uP1.29 | length 7132.3
  Top Layer w10: uP1.29@4130,7855 4891.36,7855 5222.24,7524.12 5222.24,6972.91 5222.24,3555.04 5222.24,2549.61 5215,2542.37 5215,2005 5090.59,1880.59 IC2.12@4885.67,1880.59
SPI_CLK_SMALL_SINGLE_330: IC6_x0.12 uP1.17/RX2 | length 9214.5
  Top Layer w10: v1(830,3975) 830,4006.97 435,4401.97 435,4444.54 435,6263.34 2171.65,8000 3075,8000 uP1.17/RX2@3330,8255 ; v1(1025,3900) 1145,3900 1155,3890 v1(1210,3890) ; v1(3028.09,3576.91) 3030.96,3574.04 3046.55,3574.04 3050.59,3570 3065,3570 3174.7,3679.7 3174.7,3913 3135.97,3951.73 3109.53,3951.73 IC6_x0.12@3105.67,3955.59
  Bottom Layer w10: v1(830,3975) 905,3900 v1(1025,3900) ; v1(1210,3890) 1685,3890 1785,3990 2460,3990 2624.2,3825.8 2624.2,3695.8 2750,3570 2883.56,3570 2890.47,3576.91 v1(3028.09,3576.91)
SPI_CLK_SMALL_SINGLE_331: IC6_x1.12 uP1.13 | length 11204.4
  Top Layer w10: v1(1200.48,835.48) 1200,835 895,835 175,1555 175,6845 1440,8110 1470,8140 uP1.13@1470,8255 ; v1(3028.09,521.91) 3030.96,519.04 3046.55,519.04 3050.59,515 3065,515 3174.7,624.7 3174.7,858 3135.97,896.73 3109.53,896.73 IC6_x1.12@3105.67,900.59
  Top Layer w15: uP1.13@1470,8255 uP1.13@1472.03,8252.97
  Bottom Layer w10: v1(1200.48,835.48) 1200.96,835 1685,835 1790,940 2455,940 2624.2,770.8 2624.2,640.8 2750,515 2883.56,515 2890.47,521.91 v1(3028.09,521.91)
SPI_CSb_MAIN_DUAL_33: IC1.11 uP1.41 | length 3368.9
  Top Layer w10: uP1.41@4130,7255 4820,7255 5080,6995 5080,5510 4825,5255 4825,4864.22 4855.37,4833.86 4881.81,4833.86 IC1.11@4885.67,4830
SPI_CSb_MAIN_SINGLE_330: IC5_x0.11 uP1.38 | length 4090
  Top Layer w10: 1910,5570 1910,5971.06 2180,6241.06 2180,6513.64 3021.36,7355 uP1.38@4030,7355
  Top Layer w15: 1910,5570 1960,5520 2205,5520 2295,5430 v1(2295,5405) ; v1(2523.83,5370.57) 2526.53,5370.57 2545.97,5390 IC5_x0.11@2640.67,5390
  Bottom Layer w15: v1(2295,5405) 2329.43,5370.57 v1(2523.83,5370.57)
SPI_CSb_MAIN_SINGLE_331: IC5_x1.11 uP1.4 | length 9523.2
  Top Layer w10: v1(365,4000) 345,4020 345,5658.99 345,6300.62 2134.38,8090 2220.9,8090 2385.47,8254.57 2429.57,8254.57 uP1.4@2430,8255 ; v1(395,3700) 375,3680 375,2479.79 899.79,1955 v1(930,1955) ; v1(1165,2035) 1230,2035 1660,2465
  Top Layer w15: 1660,2465 2205,2465 2295,2375 v1(2295,2350) ; v1(2523.83,2315.57) 2526.53,2315.57 2545.97,2335 IC5_x1.11@2640.67,2335
  Bottom Layer w10: v1(365,4000) 395,3970 v1(395,3700) ; v1(930,1955) 965.88,1955 1045.88,2035 v1(1165,2035)
  Bottom Layer w15: v1(2295,2350) 2329.43,2315.57 v1(2523.83,2315.57)
SPI_CSb_SMALL_DUAL_33: IC2.11 uP1.27 | length 7223.8
  Top Layer w10: uP1.27@4130,7955 4812.57,7955 5237.24,7530.33 5237.24,6971.36 5237.24,3561.25 5237.24,2002.24 5090,1855 IC2.11@4885.67,1855
SPI_CSb_SMALL_SINGLE_330: IC6_x0.11 uP1.18/TX1 | length 9058.4
  Top Layer w10: v1(895,3980) 873.22,4001.78 856.41,4001.78 450,4408.18 450,4450.75 450,6257.13 2177.87,7985 3160,7985 uP1.18/TX1@3430,8255 ; v1(1030,3960) 1130,3960 1150,3940 v1(1260,3940) ; v1(3020,3615) 3159.7,3754.7 3159.7,3902.41 3135.97,3926.14 3109.53,3926.14 IC6_x0.11@3105.67,3930
  Bottom Layer w10: v1(895,3980) 915,3960 v1(1030,3960) ; v1(1260,3940) 1311.44,3991.44 1311.44,3996.44 1320,4005 2466.21,4005 2639.2,3832.02 2639.2,3770.8 2795,3615 v1(3020,3615)
SPI_CSb_SMALL_SINGLE_331: IC6_x1.11 uP1.12 | length 11012.5
  Top Layer w10: v1(1250,885) 870,885 190,1565 190,6838.79 1450.61,8099.39 1567.54,8216.33 1567.54,8252.54 uP1.12@1570,8255 ; v1(3020,560) 3159.7,699.7 3159.7,847.41 3135.97,871.14 3109.53,871.14 IC6_x1.11@3105.67,875
  Bottom Layer w10: v1(1250,885) 1320,955 2461.21,955 2639.2,777.02 2639.2,715.8 2795,560 v1(3020,560)